# EAGLE board sensor (EAGLE 9.5.2)
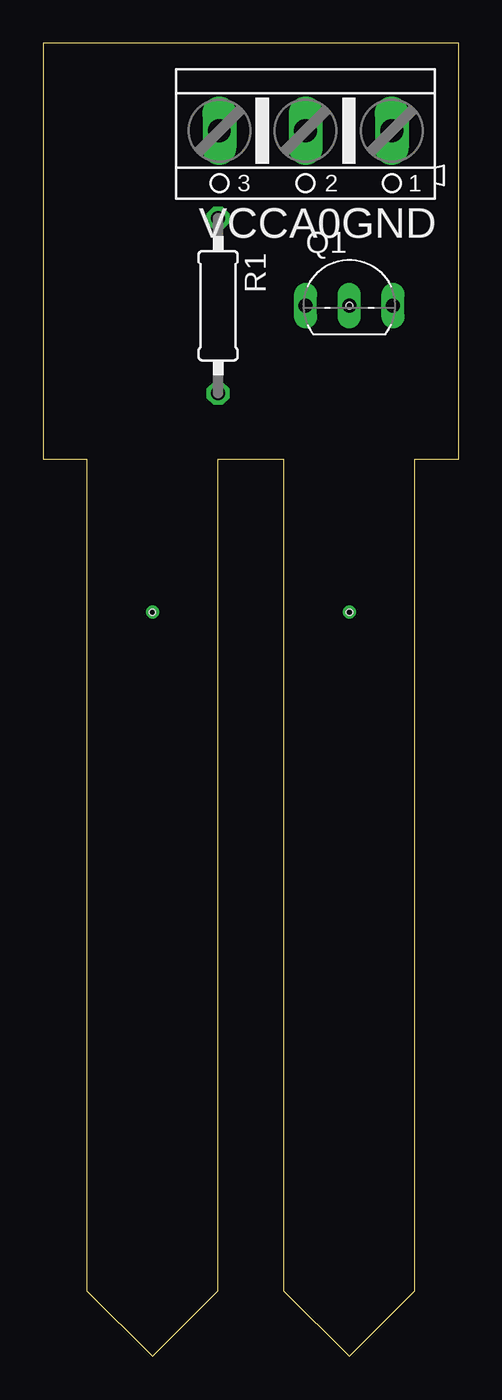
[diagram p0: board, top side]
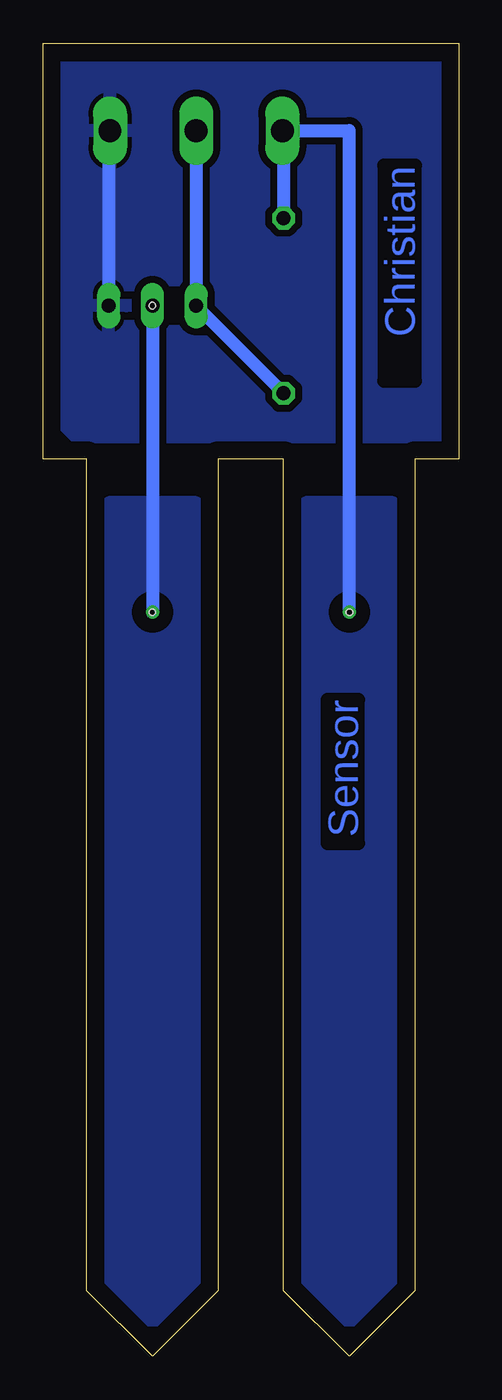
[diagram p1: board, bottom side, seen from below]

Size 24.13 x 76.2 mm. Coordinates in mm from the lower left corner, seen from the top.
Outline: 2.54,52.07 2.54,3.81 6.35,0 10.16,3.81 10.16,52.07 13.97,52.07 13.97,3.81 17.78,0 21.59,3.81 21.59,52.07 24.13,52.07 24.13,76.2 0,76.2 0,52.07 2.54,52.07
Copper layers (1*16): Top 0.035mm / dielectric 1.5mm / Bottom 0.035mm
Design rules "default": minimum track width 6mil, minimum drill 0.35mm, track to track 6mil, track to pad 6mil, pad to pad 6mil, via to via 6mil, smd to smd 6mil, copper to edge 40mil, drill to drill 6mil, minimum pad ring 10mil, minimum via ring 8mil, stop-mask expansion 4mil, vias tented up to drill 0mil, thermal gap 10mil
Net classes: 0 default: width 0.762 mm, clearance 0.406 mm
Holes 0.35 mm at 17.78,60.96 17.78,43.18 6.35,43.18

## Footprints (pad centres in the part's own frame; a part is rotated, then mirrored left to right if it is on the bottom)
TO92-EBC = drill 0.813 long: B 0,-1.27; C -2.54,-1.27; E 2.54,-1.27
0207/10 = drill 0.813 octagon: 1 -5.08,0; 2 5.08,0
AK500/3 = drill 1.321 long: 1 -5.004,0; 2 0,0; 3 5.004,0

## Placement (x,y rotation side)
Q1  BC548A  [TO92-EBC]  17.78,62.23 0 top
R1  1k  [0207/10]  10.16,60.96 270 top
VCCA0GND  [AK500/3]  15.24,71.12 180 top

## Library data of the parts
Q1 = transistor-npn
R1 = rcl; SPICEPREFIX: R
VCCA0GND = con-ptr500; OC_FARNELL: unknown; OC_NEWARK: unknown

## Nets
GND: Q1.E VCCA0GND.1
N$1: Q1.C R1.2 VCCA0GND.2
N$3: Q1.B
VCC: R1.1 VCCA0GND.3

## Tracks (layer width: path | path; a pad name or v marks a point on that pad's centre or on a via)
GND
  Bottom 0.762: VCCA0GND.1 20.32,71.04 Q1.E
  pour Bottom: 1.27,74.93 1.27,53.34 22.23,53.34 23.62,54.74 23.62,74.17 22.86,74.93
N$1
  Bottom 0.762: R1.2 Q1.C VCCA0GND.2
N$2  (via drill 0.35)
  other vias: 17.78,43.18
N$3
  Bottom 0.762: Q1.B 17.78,43.18
  pour Bottom: 15.24,49.53 20.32,49.53 20.32,3.81 17.78,1.27 15.24,3.81
N$5  (via drill 0.35)
  Bottom 0.762: v6.35,43.18 6.35,71.12
  pour Bottom: 3.81,49.53 8.89,49.53 8.89,4.19 6.48,1.78 3.94,4.32 3.94,49.4
VCC  (via drill 0.35)
  Bottom 0.762: VCCA0GND.3 10.16,71.04 R1.1 | VCCA0GND.3 v10.16,71.12 9.63,71.12 | VCCA0GND.3 6.35,71.12

## Text on the board
Bottom: Christian | Sensor